# Altium PCB 家庭版电针仪.PcbDoc (part 2 of 2)
Units mm, origin at the board's own origin, x right, y up, seen from the top; angles counter-clockwise.
Board outline 170 x 90 mm, 2 copper layers (Top Layer, Bottom Layer); 197 components, 135 nets, 622 pads, 473 vias.
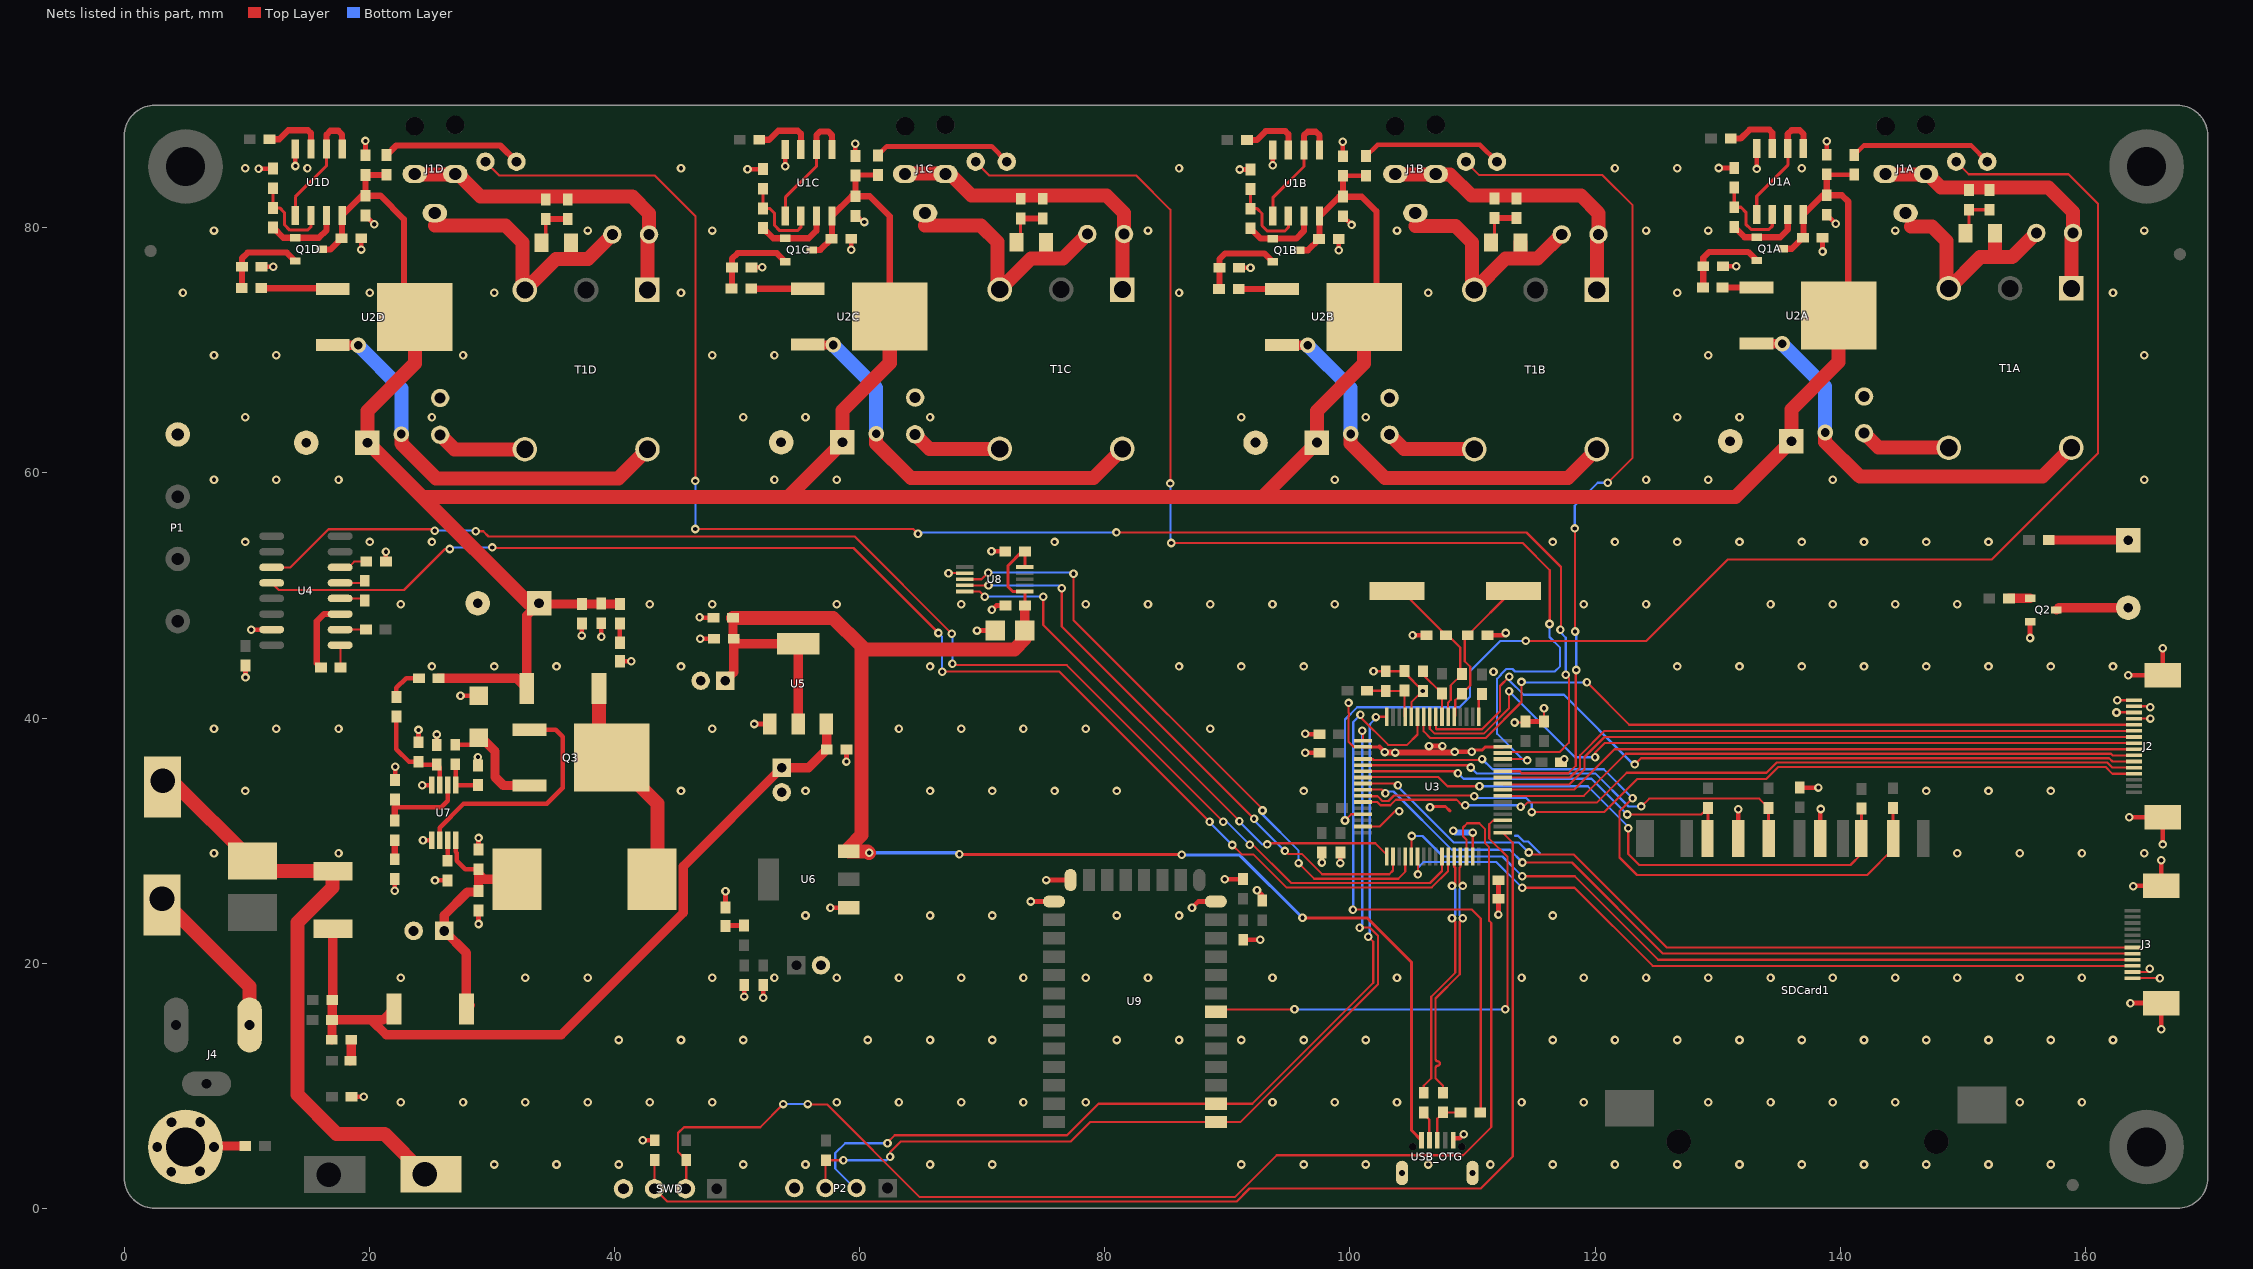
[diagram p2: the nets of this part, all layers, seen from the top]

## Via types
v1: diameter 0.7, hole 0.35, Top Layer to Bottom Layer, tented both sides, 441 vias
v2: diameter 1.2, hole 0.8, Top Layer to Bottom Layer, tented both sides, 24 vias
v3: diameter 1.27, hole 0.711, Top Layer to Bottom Layer, tented both sides, 8 vias

## Nets (pads, with @x,y where several pads share a name; then routed paths per layer and width w, separated by ;. In a path a pad name is that pad's centre, name@x,y a point inside that pad or via, vN(x,y) a via of type N, cw(c..) or ccw(c..) an arc to the next point about the centre after c; other vN are vias at no path point) (continued)
DGND: C3A.2 C3B.2 C3C.2 C3D.2 C4A.1 C4B.1 C4C.1 C4D.1 C5A.1 C5B.1 C5C.1 C5D.1 C6A.1 C6B.1 C6C.1 C6D.1 C8.2 C9.2 C10.1 C11.1 C14.1 C15.1 C16.1 C17.1 C18.1 C19.1 C20.1 C21.1 C22.1 C23.1 C24.1 C27.2 C28.2 C29.1 C30.1 C31.2 C32.1 C33.1 C34.1 C35.2 C36.1 C37.1 C38.1 C39.2 C40.1 C41.1 C42.1 C44.1 C45.2 C46.1 C47.1 C48.1 C49.1 C50.1 C51.2 D3.K D5.K FB2.2 J2.13 J2.14 J2.15 J2.16 J2.17 J2.18 J3.11 J3.12 J3.13 J3.14 P1.4 P2.4 Q2.2 R5A.1 R5B.1 R5C.1 R5D.1 R6A.1 R6B.1 R6C.1 R6D.1 R7A.1 R7B.1 R7C.1 R7D.1 R12.1 R15.2 R26.2 R29.1 R30.1 R31.1 SDCard1.3 SDCard1.6 SWD.4 U1A.4 U1B.4 U1C.4 U1D.4 U3.12 U3.18 U3.31 U3.47 U3.63 U4.15 U5.1 U6.1 U7.4 U7.5 U8.7 U9.13 U9.21 U9.22 USB_OTG.5 USB_OTG.6 USB_OTG.7 | length 161.5
  Top Layer w0.178: v1(67.243,51.825) U8.7@68.566,51.825 ; v1(99.888,41.237) 99.888,40.408 99.908,40.389 99.908,40.145 99.888,40.126 99.888,38.052 100.284,37.657 U3.18@101.061,37.657 ; U3.31@101.061,31.156 102.44,31.156 103.751,32.468 103.829,32.39 v1(104.031,32.39) ; v1(101.919,43.817) C15.1@102.926,43.817 104.424,43.817 C16.1@104.45,43.842 104.45,43.716 v1(105.948,42.217) 105.011,41.28 U3.12@105.011,40.106 ; v1(109.943,37.255) 109.943,37.36 v1@109.973,37.391 ; U3.47@110.011,28.707 v1(110.011,30.658) ; v1(113.428,39.638) 114.24,39.638 C18.1@114.33,39.728 ; C22.1@115.829,39.728 v1(115.829,40.8) ; R12.1@117.224,36.389 v1(117.482,36.648) ; v1(162.611,41.453) 162.617,41.459 J2.16@163.959,41.459 ; J3.12@163.849,18.784 v1(166.084,18.784) ; J3.11@163.849,19.284 165.122,19.284 165.254,19.416 v1(165.254,19.544) ; J2.13@163.959,39.959 v1(165.312,39.959) ; J2.15@163.959,40.959 165.239,40.959 v1(165.303,40.894)
  Top Layer w0.203: v1(162.541,40.459) J2.14@163.959,40.459
  Top Layer w0.254: U3.18@101.061,37.657 102.407,37.657 ; v1@106.587,32.644 106.735,32.791 107.798,32.791 108.153,32.436 ; v1@109.973,37.391 110.792,37.391 111.057,37.657 U3.63@112.461,37.657
  Top Layer w0.381: v1(9.888,43.319) C9.2@9.888,44.285 ; v1(10.345,47.219) U4.15@12.022,47.219 ; v1(10.954,84.83) R5D.1@12.13,84.83 ; R6D.1@11.203,76.817 v1(12.161,76.817) ; v1(13.959,85.048) U1D.4@13.959,86.418 ; FB2.2@18.548,9.1 v1(19.544,9.1) ; v1(19.331,78.228) C6D.1@19.331,79.146 ; C4D.1@19.674,81.013 v1(20.389,80.297) ; C5D.1@19.674,85.915 v1(19.674,87.09) ; C8.2@21.342,52.765 v1(21.342,53.574) ; v1(22.068,25.909) R31.1@22.068,26.884 ; C42.1@22.094,34.961 v1(22.094,36.022) ; C38.1@23.999,38.034 v1(23.999,39.035) ; v1(24.31,34.531) U7.4@25.081,34.531 ; v1(24.366,30.031) U7.5@25.081,30.031 ; v1(25.347,26.757) R29.1@26.361,26.757 ; R26.2@25.497,37.805 v1(25.497,38.659) ; v1(27.428,41.831) R30.1@28.926,41.831 ; C44.1@28.85,36.129 v1(28.85,36.82) ; v1(28.901,23.2) C36.1@28.901,24.293 ; C37.1@28.901,29.271 v1(28.901,30.223) ; v1(37.316,46.732) 37.334,46.75 C40.1@37.334,47.712 ; C41.1@38.908,47.737 38.908,46.663 v1(38.929,46.642) ; D5.K@40.432,44.64 41.335,44.64 v1(41.348,44.626) ; v1(42.291,5.55) R15.2@43.282,5.55 ; v1(46.933,48.238) 46.989,48.181 C34.1@48.065,48.181 ; v1(46.98,46.483) 46.983,46.48 C30.1@48.116,46.48 ; D3.K@49.05,24.543 v1(49.05,25.872) ; v1(50.574,17.278) C33.1@50.574,18.22 ; v1(50.847,84.787) R5C.1@52.102,84.787 ; R6C.1@51.175,76.774 v1(52.05,76.774) ; v1(51.4,39.516) U5.1@52.674,39.516 ; v1(52.123,17.179) C32.1@52.123,18.22 ; v1(53.931,85.031) U1C.4@53.931,86.375 ; v1(57.611,24.532) U6.1@59.108,24.532 ; v1(58.915,36.45) C29.1@58.915,37.44 ; v1(59.303,78.212) C6C.1@59.303,79.103 ; C4C.1@59.646,80.97 59.771,80.97 60.264,80.477 v1(60.372,80.477) ; C5C.1@59.646,85.872 v1(59.646,86.871) ; v1(69.57,47.142) C45.2@71.063,47.142 ; v1(70.752,53.602) C46.1@71.879,53.602 ; v1(70.789,48.84) 71.129,49.18 C47.1@71.883,49.18 ; v1(73.959,25.036) U9.22@75.852,25.036 ; v1(75.216,26.786) U9.21@77.202,26.786 ; v1(87.113,24.528) 87.621,25.036 U9.13@89.052,25.036 ; v1(89.784,26.86) C49.1@91.262,26.86 ; R6B.1@90.951,76.748 v1(91.887,76.748) ; v1(90.998,84.762) R5B.1@91.878,84.762 ; C50.1@91.288,21.908 v1(92.686,21.908) ; v1(92.412,25.964) 92.837,25.538 C48.1@92.837,25.108 ; v1(93.707,85.108) U1B.4@93.707,86.35 ; v1(96.357,37.175) C19.1@97.503,37.175 ; v1(96.363,38.723) 96.412,38.674 C23.1@97.503,38.674 ; C21.1@97.693,29.035 97.693,28.234 v1(97.713,28.215) ; v1(99.079,78.176) C6B.1@99.079,79.078 ; v1(99.217,28.173) C17.1@99.217,29.035 ; C4B.1@99.422,80.945 v1(100.13,80.237) ; C5B.1@99.422,85.847 v1(99.422,87.029) ; 102.407,37.657 v1(102.838,37.226) v1@102.878,37.186 ; v1(105.105,46.761) C14.1@106.236,46.761 ; v1(106.451,37.719) v1(107.544,37.719) ; USB_OTG.5@108.424,5.562 108.424,5.71 108.939,5.71 v1(109.276,6.046) ; v1@108.56,37.186 v1(108.56,37.236) ; v1@108.821,37.255 v1(109.943,37.255) ; C11.1@111.214,46.761 112.522,46.761 v1(112.7,46.939) ; v1(112.114,23.966) C24.1@112.114,25.263 C20.1@112.114,26.761 ; C18.1@114.33,39.728 C22.1@115.829,39.728 ; v1(130.083,84.881) R5A.1@131.357,84.881 ; R6A.1@130.43,76.868 v1(131.516,76.868) ; SDCard1.6@131.673,30.174 v1(131.673,32.568) ; v1(133.186,84.804) U1A.4@133.186,86.469 ; C51.2@136.703,34.328 v1(138.223,34.328) ; SDCard1.3@138.373,30.174 138.373,32.537 v1(138.419,32.583) ; v1(138.558,78.066) C6A.1@138.558,79.197 ; C4A.1@138.901,81.064 v1(139.625,80.34) ; C5A.1@138.901,85.966 v1(138.901,87.063) ; v1(155.491,46.537) Q2.2@155.491,47.869 ; v1@163.502,43.502 J2.18@166.308,43.502 v1(166.308,45.692) ; v1(163.584,31.916) J2.17@166.308,31.916 v1(166.308,29.692) ; v1(163.678,16.739) 163.691,16.752 J3.14@166.199,16.752 v1(166.199,14.611) ; v1(163.906,26.289) 163.944,26.327 J3.13@166.199,26.327 v1(166.199,28.404)
  Top Layer w0.508: v1@102.878,37.186 v1(103.683,37.186) v1@108.56,37.186
  Bottom Layer w0.178: v1@67.221,51.847 v1(67.243,51.825) ; v1@101.87,43.768 v1(101.919,43.817) ; v1(102.838,37.226) 102.912,37.301 v1@103.004,37.301 ; v1@103.831,32.39 v1(104.031,32.39) ; v1(108.433,30.81) v1@108.585,30.658 ; v1(109.943,37.255) v1@109.943,37.36 ; v1(110.011,30.658) v1@110.063,30.709 ; v1@112.06,23.912 v1(112.114,23.966) ; 113.469,30.404 113.711,30.404 114.193,29.921 114.563,29.921 114.994,29.489 115.494,28.99 115.494,28.981 ; v1@115.814,40.815 v1(115.829,40.8) ; v1(117.482,36.648) v1@117.549,36.648 ; v1@165.254,19.278 v1(165.254,19.544) ; v1@165.268,41 165.303,40.964 v1(165.303,40.894) ; v1(165.312,39.959) v1@165.318,39.965 ; v1(166.084,18.784) v1@166.214,18.654
  Bottom Layer w0.381: v1@10.926,84.859 v1(10.954,84.83) ; v1(12.161,76.817) v1@12.265,76.713 ; v1(13.959,85.048) v1@14.003,85.004 ; v1(19.331,78.228) v1@19.361,78.197 ; v1(19.544,9.1) v1@19.597,9.048 ; v1(19.674,87.09) v1@19.723,87.14 ; v1(20.389,80.297) v1@20.447,80.297 ; v1@22.054,25.895 v1(22.068,25.909) ; v1(23.999,39.035) v1@24.106,39.142 ; v1@24.258,34.583 v1(24.31,34.531) ; v1@24.308,29.973 v1(24.366,30.031) ; v1@25.322,26.782 v1(25.347,26.757) ; v1(25.497,38.659) v1@25.575,38.737 ; v1@27.398,41.802 v1(27.428,41.831) ; v1(28.85,36.82) v1@28.918,36.888 ; v1(28.901,23.2) v1@28.922,23.179 ; v1(28.901,30.223) v1@28.959,30.282 ; v1@37.316,46.687 v1(37.316,46.732) ; v1@42.263,5.578 v1(42.291,5.55) ; v1@49.041,25.881 v1(49.05,25.872) ; v1(50.574,17.278) v1@50.612,17.24 ; v1@50.804,84.744 v1(50.847,84.787) ; v1@51.321,39.594 v1(51.4,39.516) ; v1(52.05,76.774) v1@52.092,76.732 ; v1(52.123,17.179) v1@52.183,17.12 ; v1(53.931,85.031) v1@53.939,85.022 ; v1@57.591,24.552 v1(57.611,24.532) ; v1(59.303,78.212) v1@59.325,78.19 ; v1(59.646,86.871) v1@59.761,86.986 ; v1(60.372,80.477) v1@60.516,80.333 ; v1@69.565,47.138 v1(69.57,47.142) ; v1@70.735,53.585 v1(70.752,53.602) ; v1@70.753,48.84 v1(70.789,48.84) ; v1@73.906,25.089 v1(73.959,25.036) ; v1@75.174,26.828 v1(75.216,26.786) ; v1@89.767,26.878 v1(89.784,26.86) ; v1@90.914,84.699 90.935,84.699 v1(90.998,84.762) ; v1(91.887,76.748) v1@91.895,76.757 ; v1(92.412,25.964) v1@92.412,25.976 ; v1(92.686,21.908) v1@92.696,21.918 ; v1(93.707,85.108) v1@93.71,85.105 ; v1@96.341,37.191 v1(96.357,37.175) ; v1@99.069,78.166 v1(99.079,78.176) ; v1(99.217,28.173) v1@99.227,28.163 ; v1(99.422,87.029) v1@99.509,87.116 ; v1(100.13,80.237) v1@100.243,80.237 ; v1(112.7,46.939) v1@112.7,47.041 ; v1@130.076,84.874 v1(130.083,84.881) ; v1(131.516,76.868) v1@131.618,76.765 ; v1@131.657,32.584 v1(131.673,32.568) ; v1(133.186,84.804) v1@133.205,84.786 ; v1(138.223,34.328) v1@138.239,34.313 ; v1(138.558,78.066) v1@138.625,77.999 ; v1(138.901,87.063) v1@138.996,87.158 ; v1@139.625,80.245 v1(139.625,80.34) ; v1@155.449,46.495 v1(155.491,46.537) ; v1@163.855,26.289 v1(163.906,26.289) ; v1@166.141,14.554 v1(166.199,14.611) ; v1(166.199,28.404) v1@166.218,28.423
  Bottom Layer w0.508: v1@108.585,30.658 v1(110.011,30.658)
  other v1: 30.179,3.575 35.259,3.575 40.339,3.575 50.499,3.575 55.579,3.575 65.739,3.575 70.819,3.575 91.139,3.575 96.219,3.575 101.299,3.575 106.379,3.575 111.459,3.575 116.539,3.575 121.619,3.575 126.699,3.575 131.779,3.575 136.859,3.575 141.939,3.575 147.019,3.575 152.099,3.575 157.179,3.575 22.559,8.655 27.639,8.655 32.719,8.655 37.799,8.655 42.879,8.655 47.959,8.655 58.119,8.655 63.199,8.655 68.279,8.655 73.359,8.655 78.439,8.655 93.679,8.655 98.759,8.655 103.839,8.655 113.999,8.655 119.079,8.655 129.239,8.655 134.319,8.655 139.399,8.655 144.479,8.655 154.639,8.655 159.719,8.655 40.339,13.735 45.419,13.735 50.499,13.735 60.659,13.735 65.739,13.735 70.819,13.735 80.979,13.735 86.059,13.735 91.139,13.735 96.219,13.735 101.299,13.735 116.539,13.735 121.619,13.735 126.699,13.735 131.779,13.735 136.859,13.735 141.939,13.735 147.019,13.735 152.099,13.735 157.179,13.735 162.259,13.735 22.559,18.815 32.719,18.815 37.799,18.815 47.959,18.815 53.039,18.815 58.119,18.815 63.199,18.815 68.279,18.815 73.359,18.815 78.439,18.815 83.519,18.815 93.679,18.815 103.839,18.815 113.999,18.815 119.079,18.815 124.159,18.815 129.239,18.815 134.319,18.815 139.399,18.815 144.479,18.815 149.559,18.815 154.639,18.815 159.719,18.815 55.579,23.895 65.739,23.895 70.819,23.895 80.979,23.895 86.059,23.895 116.539,23.895 7.319,28.975 17.479,28.975 149.559,28.975 154.639,28.975 159.719,28.975 164.799,28.975 106.528,32.715 9.859,34.055 45.419,34.055 55.579,34.055 65.739,34.055 70.819,34.055 75.899,34.055 80.979,34.055 96.219,34.055 147.019,34.055 152.099,34.055 157.179,34.055 7.319,39.135 12.399,39.135 17.479,39.135 47.959,39.135 63.199,39.135 68.279,39.135 73.359,39.135 78.439,39.135 88.599,39.135 163.5,43.5 111.709,43.79 25.099,44.215 30.179,44.215 35.259,44.215 45.419,44.215 65.739,44.215 86.059,44.215 91.139,44.215 96.219,44.215 126.699,44.215 131.779,44.215 136.859,44.215 141.939,44.215 147.019,44.215 152.099,44.215 157.179,44.215 162.259,44.215 22.559,49.295 42.879,49.295 47.959,49.295 58.119,49.295 68.279,49.295 78.439,49.295 83.519,49.295 88.599,49.295 93.679,49.295 98.759,49.295 119.079,49.295 124.159,49.295 134.319,49.295 139.399,49.295 144.479,49.295 149.559,49.295 9.859,54.375 20.019,54.375 25.099,54.375 75.899,54.375 116.539,54.375 121.619,54.375 126.699,54.375 131.779,54.375 136.859,54.375 141.939,54.375 147.019,54.375 152.099,54.375 7.319,59.455 12.399,59.455 17.479,59.455 53.039,59.455 58.119,59.455 98.759,59.455 124.159,59.455 129.239,59.455 139.399,59.455 164.799,59.455 9.859,64.535 25.099,64.535 50.499,64.535 55.579,64.535 65.739,64.535 91.139,64.535 101.299,64.535 126.699,64.535 131.779,64.535 7.319,69.615 12.399,69.615 27.639,69.615 47.959,69.615 53.039,69.615 129.239,69.615 164.799,69.615 4.779,74.695 20.019,74.695 30.179,74.695 45.419,74.695 86.059,74.695 106.379,74.695 126.699,74.695 162.259,74.695 7.319,79.775 37.799,79.775 47.959,79.775 83.519,79.775 103.839,79.775 124.159,79.775 129.239,79.775 144.479,79.775 164.799,79.775 9.859,84.855 14.939,84.855 45.419,84.855 86.059,84.855 121.619,84.855 126.699,84.855 136.859,84.855
DS1: J2.5 U3.27 | length 65.7
  Top Layer w0.178: U3.27@101.061,33.156 102.222,33.156 102.493,32.886 103.298,32.886 103.744,33.332 108.705,33.332 109.144,32.893 v1(109.398,32.893) ; v1(113.919,32.766) 114.148,32.766 114.503,33.122 120.167,33.122 122.588,35.542 133.984,35.542 134.814,36.373 161.795,36.373 162.209,35.959 J2.5@163.959,35.959
  Bottom Layer w0.178: v1(109.398,32.893) 114.224,32.893 114.097,32.766 v1(113.919,32.766)
DS2: J2.8 U3.56 | length 52.9
  Top Layer w0.178: U3.56@112.461,34.157 112.476,34.172 118.296,34.172 121.583,37.459 J2.8@163.959,37.459
DS3: J2.11 U3.58 | length 53.7
  Top Layer w0.178: U3.58@112.461,35.157 112.47,35.147 117.959,35.147 118.781,35.969 118.781,36.973 120.767,38.959 J2.11@163.959,38.959
HOST_WAKEUP: U3.51 U9.7 | length 40.8
  Top Layer w0.178: U9.7@89.052,16.036 89.25,16.233 v1(95.471,16.233) ; U3.51@112.461,31.657 111.684,31.657 111.36,31.333 111.36,30.164 112.863,28.661 112.863,16.258 112.838,16.233 v1(112.667,16.233)
  Bottom Layer w0.178: v1(95.471,16.233) v1(112.667,16.233)
LED0: SYS1.K U3.59 | length 69.6
  Top Layer w0.178: SYS1.K@109.46,85.396 110.554,84.303 120.599,84.303 123.063,81.839 123.063,61.235 v1(121.031,59.203) ; U3.59@112.461,35.656 113.85,35.656 114.004,35.503 117.812,35.503 118.426,36.117 118.426,43.891 v1(118.459,43.925) ; v1(118.339,55.474) 118.364,55.448 v1(118.364,47.066)
  Bottom Layer w0.178: v1(118.339,55.474) 118.339,57.336 120.206,59.203 v1(121.031,59.203) ; v1(118.364,47.066) 118.459,46.971 v1(118.459,43.925)
LED1: SYS2.K U3.61 | length 100.5
  Top Layer w0.178: SYS2.K@69.46,85.396 70.579,84.277 82.55,84.277 85.347,81.481 v1(85.347,59.146) ; v1(85.417,54.283) 114.093,54.283 116.307,52.07 116.307,47.912 v1@116.053,47.658 ; U3.61@112.461,36.657 114.351,36.657 v1(114.464,36.543)
  Bottom Layer w0.178: v1(85.347,59.146) 85.347,54.627 85.417,54.557 v1(85.417,54.283) ; v1@114.19,36.542 112.004,38.728 112.004,43.213 112.326,43.534 112.326,43.577 112.749,44 113.26,44 113.466,43.794 116.717,43.794 117.145,44.221 117.145,45.745 116.281,46.609 v1(116.281,47.676) v1@116.036,47.676
LED2: SYS3.K U3.62 | length 136.9
  Top Layer w0.178: SYS3.K@29.46,85.396 30.579,84.277 43.282,84.277 46.59,80.969 v1(46.59,59.35) ; v1(46.59,55.431) 64.376,55.431 v1(64.759,55.048) ; v1(80.944,55.146) 114.399,55.146 117.221,52.324 v1@117.221,47.219 ; U3.62@112.461,37.156 112.461,37.24 117.115,37.24 117.861,37.987 117.861,43.282 v1(117.61,43.533)
  Bottom Layer w0.178: v1(46.59,55.431) v1(46.59,59.35) ; v1(64.759,55.048) 64.856,55.146 v1(80.944,55.146) ; v1(117.17,47.219) 117.17,46.996 117.61,46.557 v1(117.61,43.533)
LED3: SYS4.K U3.29 | length 115
  Top Layer w0.178: v1(99.591,31.645) 100.103,32.156 U3.29@101.061,32.156 ; v1(114.339,46.295) 124.175,46.295 130.821,52.941 152.37,52.941 161.036,61.607 161.036,81.966 158.623,84.379 150.477,84.379 SYS4.K@149.46,85.396
  Bottom Layer w0.178: v1@99.591,31.629 v1(99.591,31.645) 99.591,39.882 100.596,40.887 108.93,40.887 109.786,41.742 109.786,43.829 112.252,46.295 v1(114.339,46.295)
NetBEEP_1: BEEP.1 R16.1 | length 6.5
  Top Layer w0.762: R16.1@157.01,54.534 163.466,54.534 BEEP.1@163.5,54.5
NetBEEP_2: BEEP.2 Q2.3 | length 5.9
  Top Layer w0.762: Q2.3@157.641,48.819 157.822,49 BEEP.2@163.5,49
NetC1A_1: C1A.1 C2A.1 D1A.A | length 3.7
  Top Layer w0.254: D1A.A@150.223,79.56 150.509,79.846 C1A.1@150.509,81.475 C2A.1@152.185,81.475
NetC1A_2: C1A.2 C2A.2 J1A.1 R2A.2 T1A.1 | length 22.9
  Top Layer w1.143: J1A.1@143.7,84.361 147,84.361 147.168,84.361 148.238,83.291 150.509,83.291 152.185,83.291 157.011,83.291 158.995,81.307 R2A.2@158.995,79.585 158.858,79.448 T1A.1@158.858,75.059
NetC1B_1: C1B.1 C2B.1 D1B.A | length 3.9
  Top Layer w0.254: D1B.A@111.506,78.803 111.792,79.088 C1B.1@111.792,80.797
  Top Layer w0.508: C1B.1@111.792,80.797 C2B.1@113.595,80.797
NetC1B_2: C1B.2 C2B.2 J1B.1 R2B.2 T1B.1 | length 24.2
  Top Layer w1.143: J1B.1@103.7,84.361 107,84.361 108.179,84.361 109.91,82.63 111.792,82.63 113.595,82.63 118.836,82.63 120.278,81.188 R2B.2@120.278,79.466 120.141,79.329 T1B.1@120.141,74.94
NetC1C_1: C1C.1 C2C.1 D1C.A | length 3.9
  Top Layer w0.254: D1C.A@72.797,78.828 73.133,79.165 C1C.1@73.133,80.771
  Top Layer w0.508: C1C.1@73.133,80.771 C2C.1@74.936,80.771
NetC1C_2: C1C.2 C2C.2 J1C.1 R2C.2 T1C.1 | length 25.5
  Top Layer w1.143: J1C.1@63.7,84.437 67,84.437 67.335,84.437 69.139,82.634 69.444,82.634 69.447,82.63 73.133,82.63 74.936,82.63 80.151,82.63 81.569,81.213 R2C.2@81.569,79.492 81.431,79.354 T1C.1@81.431,74.966
NetC1D_1: C1D.1 C2D.1 D1D.A | length 3.9
  Top Layer w0.254: D1D.A@34.044,78.795 34.38,79.131 C1D.1@34.38,80.713
  Top Layer w0.508: C1D.1@34.38,80.713 C2D.1@36.184,80.713
NetC1D_2: C1D.2 C2D.2 J1D.1 R2D.2 T1D.1 | length 26.5
  Top Layer w1.143: J1D.1@23.878,84.336 27,84.336 27.272,84.336 29.054,82.554 34.38,82.554 36.184,82.554 41.441,82.554 42.816,81.18 R2D.2@42.816,79.458 42.678,79.321 T1D.1@42.678,74.932
NetC7_1: C7.1 U4.2 | length 2.1
  Top Layer w0.178: U4.2@17.61,47.219 C7.1@19.706,47.219
NetC8_1: C8.1 U4.6 | length 2.3
  Top Layer w0.178: U4.6@17.61,52.299 18.295,52.299 18.761,52.765 C8.1@19.742,52.765
NetC11_2: C11.2 R10.1 U3.5 Y1.1 | length 12.7
  Top Layer w0.178: U3.5@108.511,40.106 108.585,40.181 108.585,41.453 109.121,41.989 R10.1@109.149,41.989 109.815,42.655 109.815,44.181 109.36,44.637 109.36,46.507 C11.2@109.614,46.761 113.221,50.368 Y1.1@113.335,50.368
NetC12_1: C12.1 U4.5 | length 2.1
  Top Layer w0.178: U4.5@17.61,51.029 19.451,51.029 C12.1@19.621,51.199
NetC12_2: C12.2 U4.4 | length 2.1
  Top Layer w0.178: U4.4@17.61,49.759 19.461,49.759 C12.2@19.621,49.599
NetC13_1: C13.1 U4.3 | length 6.1
  Top Layer w0.508: C13.1@16.048,44.12 15.697,44.471 15.697,47.904 16.281,48.489 U4.3@17.61,48.489
NetC13_2: C13.2 U4.1 | length 1.8
  Top Layer w0.178: U4.1@17.61,45.949 17.648,45.911 C13.2@17.648,44.12
NetC14_2: C14.2 R10.2 U3.6 Y1.2 | length 13.3
  Top Layer w0.178: Y1.2@103.835,50.368 104.229,50.368 C14.2@107.836,46.761 108.001,46.761 109.004,45.758 109.004,43.733 R10.2@109.149,43.589 108.229,42.669 108.229,41.486 108.011,41.268 U3.6@108.011,40.106
NetC15_2: C15.2 C16.2 FB1.2 U3.13 | length 5.2
  Top Layer w0.178: FB1.2@101.389,42.23 102.913,42.23 C15.2@102.926,42.217 104.424,42.217 C16.2@104.45,42.242 104.45,40.168 U3.13@104.511,40.106
NetC35_1: C35.1 C36.2 C37.2 D2.C L1.1 U7.8 | length 20.9
  Top Layer w0.381: U7.8@27.031,30.031 27.031,29.09 27.129,28.992 27.129,28.371 27.829,27.671 C37.2@28.901,27.671
  Top Layer w0.762: D2.C@28.215,16.569 D2.C@27.91,16.264 27.91,20.834 C35.1@26.105,22.639 26.105,23.915 28.005,25.814 28.822,25.814 C36.2@28.901,25.893 28.901,27.284 29.339,26.845 L1.1@32.037,26.845
NetC38_2: C38.2 R24.2 R26.1 U7.3 | length 8.2
  Top Layer w0.381: R24.2@22.195,40.117 22.195,37.466 23.227,36.434 C38.2@23.999,36.434 24.227,36.205 R26.1@25.497,36.205 25.731,35.972 U7.3@25.731,34.531
NetC42_2: C42.2 C43.2 U7.2 | length 6.9
  Top Layer w0.381: 22.068,32.723 22.094,32.723 25.846,32.723 26.381,33.258 U7.2@26.381,34.531
  Top Layer w0.508: C43.2@22.068,31.633 22.068,32.723
NetC43_1: C43.1 R31.2 | length 1.5
  Top Layer w0.508: R31.2@22.068,28.484 C43.1@22.068,30.033
NetC44_2: C44.2 R28.1 U7.1 | length 3.5
  Top Layer w0.381: R28.1@26.996,36.231 27.031,36.196 U7.1@27.031,34.531 U7.1@27.031,34.531 C44.2@28.85,34.529
NetD1A_C: D1A.C J1A.2 R2A.1 T1A.3 | length 18.3
  Top Layer w1.143: 145.759,80.119 147.483,80.119 148.68,78.922 148.68,75.237 T1A.3@148.858,75.059 151.4,77.601 152.643,77.601 ; D1A.C@152.623,79.56 152.623,77.62 152.643,77.601 ; R2A.1@155.995,79.585 154.011,77.601 152.643,77.601
NetD1B_C: D1B.C J1B.2 R2B.1 T1B.3 | length 19.5
  Top Layer w1.143: 105.333,80.145 108.621,80.145 109.963,78.803 109.963,75.118 T1B.3@110.141,74.94 112.682,77.482 113.906,77.482 113.925,77.482 ; D1B.C@113.906,78.803 113.906,77.501 113.925,77.482 ; R2B.1@117.278,79.466 115.294,77.482 113.925,77.482
NetD1C_C: D1C.C J1C.2 R2C.1 T1C.3 | length 20.8
  Top Layer w1.143: 65.333,80.17 69.911,80.17 71.253,78.828 71.253,75.143 T1C.3@71.431,74.966 73.973,77.507 75.197,77.507 75.216,77.507 ; D1C.C@75.197,78.828 75.197,77.527 75.216,77.507 ; R2C.1@78.569,79.492 76.584,77.507 75.216,77.507
NetD1D_C: D1D.C J1D.2 R2D.1 T1D.3 | length 22
  Top Layer w1.143: 25.333,80.196 31.1,80.196 32.501,78.795 32.501,75.11 T1D.3@32.678,74.932 35.22,77.474 36.444,77.474 36.463,77.474 ; D1D.C@36.444,78.795 36.444,77.493 36.463,77.474 ; R2D.1@39.816,79.458 37.831,77.474 36.463,77.474
NetD3_A: D3.A R23.1 | length 1.5
  Top Layer w0.381: D3.A@49.05,23.043 49.078,23.071 R23.1@50.548,23.071
NetD4_A: D4.A L1.2 Q3.2 | length 17.7
  Top Layer w1.143: D4.A@38.731,42.416 38.731,37.804 Q3.2@39.757,36.777 43.5,33.034 43.5,27.309 L1.2@43.037,26.845
NetD5_A: D5.A R27.1 | length 1.6
  Top Layer w0.381: D5.A@40.432,46.14 R27.1@40.432,47.712
NetF1_1: F1.1 H1.1 LB1.1 VD1.1 | length 49.5
  Top Layer w1.143: LB1.1@3.124,34.874 3.903,34.874 VD1.1@10.439,28.338 11.269,27.508 F1.1@17.018,27.508 16.993,27.483 16.993,26.193 14.111,23.312 14.111,9.29 17.316,6.085 21.213,6.085 H1.1@24.522,2.776
NetFB3_2: FB3.2 MH1.MH1 | length 4.9
  Top Layer w0.762: MH1.MH1@5,5 5.08,5.08 FB3.2@9.868,5.08
  other v2: 3.832,2.993 6.168,3.019 2.685,5 7.315,5 3.857,7.032 6.195,7.034
NetJ4_4: J4.4 LA1.1 | length 13.2
  Top Layer w1.143: LA1.1@3.073,25.248 10.216,18.105 J4.4@10.216,14.961
NetPOWER_A: POWER.A R22.1 | length 1.7
  Top Layer w0.762: POWER.A@18.445,12.047 18.518,12.12 R22.1@18.518,13.749
NetQ1A_1: Q1A.1 R4A.1 U1A.7 | length 6.2
  Top Layer w0.508: R4A.1@131.357,80.081 132.198,79.24 Q1A.1@133.178,79.24 135.105,79.24 135.726,79.862 U1A.7@135.726,81.069
NetQ1A_2: Q1A.2 R3A.2 R6A.2 | length 7.4
  Top Layer w0.508: R3A.2@128.805,75.242 R3A.2@128.805,75.14 128.83,75.166 R6A.2@128.83,76.868 128.83,77.563 129.3,78.033 132.485,78.033 Q1A.2@133.178,77.34
NetQ1B_1: Q1B.1 R4B.1 U1B.7 | length 6.2
  Top Layer w0.508: R4B.1@91.878,79.962 92.719,79.121 Q1B.1@93.699,79.121 95.625,79.121 96.247,79.743 U1B.7@96.247,80.95
NetQ1B_2: Q1B.2 R3B.2 R6B.2 | length 7.4
  Top Layer w0.508: R3B.2@89.326,75.123 R3B.2@89.326,75.021 89.351,75.047 R6B.2@89.351,76.748 89.351,77.444 89.821,77.914 93.006,77.914 Q1B.2@93.699,77.221
NetQ1C_1: Q1C.1 R4C.1 U1C.7 | length 6.2
  Top Layer w0.508: R4C.1@52.102,79.987 52.943,79.146 Q1C.1@53.922,79.146 55.849,79.146 56.471,79.768 U1C.7@56.471,80.975
NetQ1C_2: Q1C.2 R3C.2 R6C.2 | length 7.4
  Top Layer w0.508: R3C.2@49.549,75.148 R3C.2@49.549,75.047 49.575,75.072 R6C.2@49.575,76.774 49.575,77.469 50.044,77.939 53.23,77.939 Q1C.2@53.922,77.246
NetQ1D_1: Q1D.1 R4D.1 U1D.7 | length 6.2
  Top Layer w0.508: R4D.1@12.13,80.03 12.971,79.189 Q1D.1@13.95,79.189 15.877,79.189 16.499,79.811 U1D.7@16.499,81.018
NetQ1D_2: Q1D.2 R3D.2 R6D.2 | length 7.4
  Top Layer w0.508: R3D.2@9.577,75.191 R3D.2@9.577,75.09 9.603,75.115 R6D.2@9.603,76.817 9.603,77.512 10.072,77.982 13.258,77.982 Q1D.2@13.95,77.289
NetQ2_1: Q2.1 R18.1 | length 1.7
  Top Layer w0.762: R18.1@153.759,49.759 153.769,49.769 Q2.1@155.491,49.769
NetQ3_1: Q3.1 U7.6 | length 19.6
  Top Layer w0.381: U7.6@25.731,30.031 25.731,31.059 27.672,33 34.479,33 35.777,34.298 35.777,38.489 35.209,39.057 Q3.1@33.057,39.057
NetQ3_3: Q3.3 R28.2 R30.2 | length 9.2
  Top Layer w0.381: R28.2@26.996,37.831 28.355,37.831 R30.2@28.926,38.402
  Top Layer w0.762: R30.2@28.926,38.402 29.133,38.402 30.24,37.295 30.24,35.187 30.93,34.497 Q3.3@33.057,34.497
NetR1A_2: R1A.2 U1A.3 | length 5.1
  Top Layer w0.508: R1A.2@131.065,87.278 131.865,87.278 132.602,88.015 134.202,88.015 134.456,87.761 U1A.3@134.456,86.469
NetR1B_2: R1B.2 U1B.3 | length 5.1
  Top Layer w0.508: R1B.2@91.586,87.159 92.386,87.159 93.123,87.896 94.723,87.896 94.977,87.642 U1B.3@94.977,86.35
NetR1C_2: R1C.2 U1C.3 | length 5.1
  Top Layer w0.508: R1C.2@51.81,87.185 52.61,87.185 53.346,87.921 54.947,87.921 55.201,87.667 U1C.3@55.201,86.375
NetR1D_2: R1D.2 U1D.3 | length 5.1
  Top Layer w0.508: R1D.2@11.838,87.228 12.638,87.228 13.374,87.964 14.975,87.964 15.229,87.71 U1D.3@15.229,86.418
NetR3A_1: R3A.1 U2A.1 | length 2.8
  Top Layer w0.508: R3A.1@130.405,75.14 130.418,75.127 U2A.1@133.177,75.127
NetR3B_1: R3B.1 U2B.1 | length 2.8
  Top Layer w0.508: R3B.1@90.926,75.021 90.939,75.008 U2B.1@93.698,75.008
NetR3C_1: R3C.1 U2C.1 | length 4.6
  Top Layer w0.508: R3C.1@51.149,75.047 51.163,75.033 U2C.1@55.75,75.033
NetR3D_1: R3D.1 U2D.1 | length 5.9
  Top Layer w0.508: R3D.1@11.177,75.09 11.191,75.076 16.921,75.076 U2D.1@16.998,75
NetR4A_2: R4A.2 R5A.2 U1A.6 | length 7.1
  Top Layer w0.254: R5A.2@131.357,83.281 R4A.2@131.357,81.681 131.9,81.681 132.297,81.284 132.297,80.293 132.729,79.862 134.177,79.862 134.456,80.141 U1A.6@134.456,81.069
NetR4B_2: R4B.2 R5B.2 U1B.6 | length 7.1
  Top Layer w0.254: R5B.2@91.878,83.162 R4B.2@91.878,81.562 92.421,81.562 92.818,81.165 92.818,80.174 93.25,79.743 94.698,79.743 94.977,80.022 U1B.6@94.977,80.95
NetR4C_2: R4C.2 R5C.2 U1C.6 | length 7.1
  Top Layer w0.254: R5C.2@52.102,83.187 R4C.2@52.102,81.587 52.645,81.587 53.042,81.19 53.042,80.2 53.473,79.768 54.921,79.768 55.201,80.047 U1C.6@55.201,80.975
NetR4D_2: R4D.2 R5D.2 U1D.6 | length 7.1
  Top Layer w0.254: R5D.2@12.13,83.23 R4D.2@12.13,81.63 12.673,81.63 13.07,81.233 13.07,80.243 13.501,79.811 14.949,79.811 15.229,80.09 U1D.6@15.229,81.018
NetR7A_2: R7A.2 T1A.6 | length 7.4
  Top Layer w1.143: R7A.2@141.949,63.243 143.133,62.059 T1A.6@148.858,62.059
NetR7B_2: R7B.2 T1B.6 | length 7.4
  Top Layer w1.143: R7B.2@103.232,63.124 104.415,61.94 T1B.6@110.141,61.94
NetR7C_2: R7C.2 T1C.6 | length 7.4
  Top Layer w1.143: R7C.2@64.522,63.149 65.706,61.966 T1C.6@71.431,61.966
NetR7D_2: R7D.2 T1D.6 | length 7.4
  Top Layer w1.143: R7D.2@25.77,63.116 26.953,61.932 T1D.6@32.678,61.932
NetR11_1: R11.1 U3.1 | length 2
  Top Layer w0.178: U3.1@110.511,40.106 110.511,41.7 R11.1@110.774,41.963
NetR17_2: R17.2 SYS1.A | length 11.7
  Top Layer w0.381: R17.2@101.309,85.848 102.253,86.792 110.604,86.792 SYS1.A@112,85.396
NetR19_2: R19.2 SYS2.A | length 11.3
  Top Layer w0.381: R19.2@61.486,85.91 62.216,86.639 70.757,86.639 SYS2.A@72,85.396
NetR20_2: R20.2 SYS3.A | length 11.5
  Top Layer w0.508: R20.2@21.395,85.937 22.174,86.716 30.681,86.716 SYS3.A@32,85.396
NetR21_2: R21.2 SYS4.A | length 11.7
  Top Layer w0.381: R21.2@141.152,85.941 141.927,86.716 150.681,86.716 SYS4.A@152,85.396
NetR24_1: R24.1 R25.1 | length 2.9
  Top Layer w0.381: R24.1@22.195,41.717 22.195,42.458 22.991,43.254 R25.1@24.037,43.254
NetR29_2: R29.2 U7.7 | length 1.7
  Top Layer w0.381: R29.2@26.361,28.357 26.381,28.377 U7.7@26.381,30.031
NetR32_2: R32.2 USB_OTG.2 | length 2.5
  Top Layer w0.178: R32.2@105.893,7.836 105.959,7.77 106.474,7.254 USB_OTG.2@106.474,5.562
NetR33_2: R33.2 R34.2 USB_OTG.3 | length 4
  Top Layer w0.178: USB_OTG.3@107.124,5.562 107.124,7.304 107.511,7.691 107.594,7.691 R33.2@107.594,7.836 107.607,7.823 R34.2@109.03,7.823
NetT1A_4: T1A.4 U2A.3 | length 33.8
  Top Layer w0.762: U2A.3@133.177,70.567 133.204,70.54 v3(135.269,70.54)
  Top Layer w1.143: v3(138.774,63.301) 138.774,62.513 141.594,59.694 156.493,59.694 T1A.4@158.858,62.059
  Bottom Layer w1.143: v3(135.269,70.54) 138.774,67.035 v3(138.774,63.301)
NetT1B_4: T1B.4 U2B.3 | length 33.8
  Top Layer w0.762: U2B.3@94.46,70.448 94.487,70.421 v3(96.552,70.421)
  Top Layer w1.143: v3(100.057,63.182) 100.057,62.394 102.876,59.575 117.775,59.575 T1B.4@120.141,61.94
  Bottom Layer w1.143: v3(96.552,70.421) 100.057,66.916 v3(100.057,63.182)
NetT1C_4: T1C.4 U2C.3 | length 33.8
  Top Layer w0.762: U2C.3@55.75,70.473 55.777,70.446 v3(57.842,70.446)
  Top Layer w1.143: v3(61.347,63.207) 61.347,62.42 64.167,59.6 79.066,59.6 T1C.4@81.431,61.966
  Bottom Layer w1.143: v3(57.842,70.446) 61.347,66.941 v3(61.347,63.207)
NetT1D_4: T1D.4 U2D.3 | length 33.8
  Top Layer w0.762: U2D.3@16.998,70.44 17.024,70.413 v3(19.089,70.413)
  Top Layer w1.143: v3(22.595,63.174) 22.595,62.386 25.414,59.567 40.313,59.567 T1D.4@42.678,61.932
  Bottom Layer w1.143: v3(19.089,70.413) 22.595,66.908 v3(22.595,63.174)
NetU1A_1: U1A.1 U1A.2 U1A.5 | length 10.4
  Top Layer w0.254: U1A.5@133.186,81.069 133.186,82.579 135.726,85.119 U1A.2@135.726,86.469
  Top Layer w0.508: U1A.2@135.726,86.469 135.726,87.659 136.031,87.964 136.691,87.964 136.996,87.659 U1A.1@136.996,86.469
NetU1B_1: U1B.1 U1B.2 U1B.5 | length 10.4
  Top Layer w0.254: U1B.5@93.707,80.95 93.707,82.46 96.247,85 U1B.2@96.247,86.35
  Top Layer w0.508: U1B.2@96.247,86.35 96.247,87.54 96.552,87.845 97.212,87.845 97.517,87.54 U1B.1@97.517,86.35
NetU1C_1: U1C.1 U1C.2 U1C.5 | length 10.4
  Top Layer w0.254: U1C.5@53.931,80.975 53.931,82.486 56.471,85.026 U1C.2@56.471,86.375
  Top Layer w0.508: U1C.2@56.471,86.375 56.471,87.566 56.775,87.871 57.436,87.871 57.741,87.566 U1C.1@57.741,86.375
NetU1D_1: U1D.1 U1D.2 U1D.5 | length 10.4
  Top Layer w0.254: U1D.5@13.959,81.018 13.959,82.529 16.499,85.069 U1D.2@16.499,86.418
  Top Layer w0.508: U1D.2@16.499,86.418 16.499,87.609 16.803,87.913 17.464,87.913 17.769,87.609 U1D.1@17.769,86.418
NetU3_33: U3.33 U8.10 | length 45
  Top Layer w0.178: U8.10@68.566,50.325 69.791,50.325 v1(70.206,49.911) ; v1(74.981,49.911) 74.981,47.6 v1@90.995,31.585 ; v1@93.243,29.667 v1(93.243,29.693) 93.335,29.784 102.072,29.784 103.011,28.845 U3.33@103.011,28.707
  Bottom Layer w0.178: v1@70.206,49.835 v1(70.206,49.911) v1(74.981,49.911) ; v1(90.983,31.572) 90.983,31.547 92.837,29.693 v1(93.243,29.693)
NetU3_34: U3.34 U8.9 | length 47.9
  Top Layer w0.178: U8.9@68.566,50.825 v1(70.51,50.825) ; v1(76.479,50.597) 76.479,47.473 v1(92.177,31.775) ; v1(94.691,29.159) 94.952,28.898 96.095,28.898 97.739,27.254 103.2,27.254 103.511,27.565 U3.34@103.511,28.707
  Bottom Layer w0.178: v1(70.51,50.825) 76.251,50.825 v1(76.479,50.597) ; v1(92.177,31.775) 92.177,31.674 v1(94.691,29.159)
NetU3_36: U3.36 U8.8 | length 51.1
  Top Layer w0.178: U8.8@68.566,51.325 69.944,51.325 v1(70.485,51.867) ; v1(77.445,51.765) 77.445,47.981 92.913,32.512 v1(92.862,32.461) ; v1(95.809,28.169) 97.079,26.899 103.937,26.899 104.511,27.473 U3.36@104.511,28.707
  Bottom Layer w0.178: v1(70.485,51.867) 77.343,51.867 v1(77.445,51.765) ; v1(92.862,32.461) 92.862,32.131 95.809,29.185 v1(95.809,28.169)
PC4: J3.7 U3.24 | length 68.7
  Top Layer w0.178: U3.24@101.061,34.656 103.781,34.656 v1(103.915,34.523) ; v1(114.579,29.032) 114.739,28.873 118.27,28.873 125.859,21.284 J3.7@163.849,21.284
  Bottom Layer w0.178: v1(103.915,34.523) v1@103.8,34.523 ; v1(114.579,29.032) 113.767,29.845 108.478,29.845 v1@103.8,34.523 ; v1@103.8,34.523 103.735,34.588 103.734,34.586 103.797,34.523 v1@103.8,34.523
PC5: J3.8 U3.25 | length 69
  Top Layer w0.178: U3.25@101.061,34.157 101.067,34.163 102.61,34.163 102.686,34.087 102.895,34.087 v1(102.895,33.858) ; v1(114.071,28.219) 118.11,28.219 125.546,20.784 J3.8@163.849,20.784
  Bottom Layer w0.178: v1(102.895,33.858) v1@102.895,34.011 ; v1(114.071,28.219) 113.03,29.261 108.868,29.261 108.861,29.254 108.312,29.254 103.555,34.011 v1@102.895,34.011 ; v1@102.895,34.011 102.87,34.036 102.819,34.036 102.895,34.112 v1@102.895,34.011
PC6: J3.9 U3.37 | length 64.9
  Top Layer w0.178: v1@104.902,30.505 v1(105.029,30.378) 105.011,30.36 U3.37@105.011,28.707 ; v1(114.046,27.102) 118.339,27.102 125.157,20.284 J3.9@163.849,20.284
  Bottom Layer w0.178: v1(105.029,30.378) 105.918,30.378 107.594,28.702 112.446,28.702 v1(114.046,27.102)
PC7: J3.10 U3.38 | length 64
  Top Layer w0.178: U3.38@105.511,28.707 105.546,28.672 v1(105.546,27.244) ; v1(114.046,26.162) 118.319,26.162 124.697,19.784 J3.10@163.849,19.784
  Bottom Layer w0.178: v1(105.546,27.244) 105.546,27.807 105.987,28.249 111.959,28.249 v1(114.046,26.162)
RESET: C10.2 R9.1 U3.7 | length 4.4
  Top Layer w0.178: C10.2@105.948,43.817 105.948,43.563 R9.1@107.498,42.014 107.511,42.001 U3.7@107.511,40.106
"SD CS": R35.1 SDCard1.1 U3.20 | length 56.2
  Top Layer w0.178: U3.20@101.061,36.657 101.838,36.657 101.926,36.569 109.581,36.569 109.6,36.587 110.11,36.587 110.129,36.569 110.691,36.569 v1(110.779,36.656) ; v1@123.317,33.426 123.165,33.579 v1(123.056,33.47) 121.996,32.41 121.996,28.621 123.413,27.203 142.215,27.203 SDCard1.1@144.297,29.286
  Top Layer w0.254: SDCard1.1@144.297,29.286 R35.1@144.297,32.677
  Bottom Layer w0.178: v1(110.779,36.656) 111.624,35.823 120.703,35.823 v1(123.056,33.47)
SHCP1: J2.4 U3.26 | length 66
  Top Layer w0.178: U3.26@101.061,33.656 101.095,33.622 102.259,33.622 102.64,33.241 103.151,33.241 103.597,33.688 110.076,33.688 v1(110.134,33.63) ; v1(114.833,32.334) 120.752,32.334 123.444,35.026 133.971,35.026 134.961,36.017 161.647,36.017 162.206,35.459 J2.4@163.959,35.459
  Bottom Layer w0.178: v1(110.134,33.63) 110.211,33.706 110.432,33.484 114.378,33.484 114.833,33.029 v1(114.833,32.334)
SHCP2: J2.7 U3.55 | length 53
  Top Layer w0.178: U3.55@112.461,33.656 112.462,33.655 119.075,33.655 122.504,37.084 162.089,37.084 162.214,36.959 J2.7@163.959,36.959 J2.7@163.957,36.96
SHCP3: J2.10 U3.57 | length 53.7
  Top Layer w0.178: U3.57@112.461,34.656 112.536,34.581 117.896,34.581 119.137,35.822 119.137,36.826 120.77,38.459 J2.10@163.959,38.459
"SPI1 MISO": R37.1 SDCard1.7 U3.22 | length 32.4
  Top Layer w0.178: U3.22@101.061,35.656 108.661,35.656 v1(108.808,35.509) ; v1(122.631,32.131) 128.664,32.131 R37.1@129.21,32.677
  Top Layer w0.254: SDCard1.7@129.173,30.174 129.21,30.211 R37.1@129.21,32.677
  Bottom Layer w0.178: v1(108.808,35.509) 109.266,35.052 119.71,35.052 v1(122.631,32.131)
"SPI1 MOSI": R38.1 SDCard1.2 U3.23 | length 49
  Top Layer w0.178: U3.23@101.061,35.157 101.091,35.186 107.209,35.186 107.96,34.435 v1(110.57,34.435) ; v1(122.707,31.013) 122.707,28.912 123.604,28.016 140.843,28.016 141.723,28.896 SDCard1.2@141.723,30.174
  Top Layer w0.254: SDCard1.2@141.723,30.174 141.723,32.617 R38.1@141.732,32.626
  Bottom Layer w0.178: v1(110.57,34.435) 119.412,34.435 122.707,31.14 v1(122.707,31.013)
"SPI1 SCK": R36.1 SDCard1.5 U3.21 | length 37.8
  Top Layer w0.178: U3.21@101.061,36.156 109.669,36.156 v1(109.855,35.971) v1@110.041,36.156 ; v1(123.774,32.791) 124.409,33.426 133.388,33.426 R36.1@134.137,32.677
  Top Layer w0.254: R36.1@134.137,32.677 134.137,30.21 SDCard1.5@134.173,30.174
  Bottom Layer w0.178: v1(109.855,35.971) 110.358,35.468 120.042,35.468 122.719,32.791 v1(123.774,32.791)
STCP1: J2.6 U3.8 | length 64.4
  Top Layer w0.178: U3.8@107.011,40.106 107.011,39.136 107.057,39.09 110.771,39.09 112.243,40.561 112.243,42.621 v1(113.005,43.383) ; v1(123.241,36.22) 123.749,36.728 161.942,36.728 162.212,36.459 J2.6@163.959,36.459
  Bottom Layer w0.178: v1(113.005,43.383) 113.005,43.07 114.177,41.897 117.462,41.897 123.139,36.22 v1(123.241,36.22)
STCP2: J2.9 U3.9 | length 63.8
  Top Layer w0.178: U3.9@106.511,40.106 106.511,39.133 106.909,38.734 110.919,38.734 112.979,40.795 v1(112.979,42.189) ; v1(119.998,36.811) 119.998,37.183 120.773,37.959 J2.9@163.959,37.959
  Bottom Layer w0.178: v1(112.979,42.189) 118.358,36.811 v1(119.998,36.811)
STCP3: J2.12 U3.10 | length 63.7
  Top Layer w0.178: U3.10@106.011,40.106 106.011,38.921 106.554,38.379 111.066,38.379 113.995,41.308 v1(113.995,42.951) ; v1(119.333,42.916) 122.791,39.459 J2.12@163.959,39.459
  Bottom Layer w0.178: v1(113.995,42.951) 114.097,42.85 114.163,42.916 v1(119.333,42.916)
SWCLK: R15.1 SWD.3 U3.49 | length 101.1
  Top Layer w0.178: R15.1@43.282,3.95 43.256,3.924 SWD.3@43.256,1.6 44.31,0.546 90.736,0.546 91.81,1.62 110.675,1.62 113.284,4.23 113.284,29.833 U3.49@112.461,30.656
SWDIO: R14.1 SWD.2 U3.46 | length 106.9
  Top Layer w0.178: SWD.2@45.796,1.6 45.847,1.651 R14.1@45.847,3.95 45.18,4.617 45.18,6.143 45.661,6.623 51.886,6.623 v1(53.772,8.509) ; v1(55.753,8.509) 55.728,8.484 57.325,8.484 64.894,0.915 90.602,0.915 94.023,4.335 109.231,4.335 111.522,6.627 111.522,23.29 111.352,23.46 111.352,29.474 111.004,29.822 111.004,30.962 110.544,31.422 109.576,31.422 109.224,31.07 109.224,30.366 109.511,30.079 U3.46@109.511,28.707
  Bottom Layer w0.178: v1(53.772,8.509) v1(55.753,8.509)
UART1_RXD: U3.43 U4.12 | length 112.4
  Top Layer w0.178: U4.12@12.022,51.029 12.601,50.45 22.814,50.45 26.162,53.797 v1(26.543,53.797) ; v1@30.175,53.873 59.487,53.873 v1(66.421,46.939) ; v1(66.726,43.79) 76.302,43.79 v1(88.544,31.547) ; v1(90.399,29.642) 91.161,28.88 92.118,28.88 94.81,26.187 106.675,26.187 108.011,27.523 U3.43@108.011,28.707
  Bottom Layer w0.178: v1(26.543,53.797) 26.67,53.924 v1(30.023,53.924) ; v1(66.421,46.939) 66.726,46.634 v1(66.726,43.79) ; v1(88.544,31.547) 88.544,31.496 v1(90.399,29.642)
UART1_TXD: U3.42 U4.11 | length 112.1
  Top Layer w0.178: U4.11@12.022,52.299 13.551,52.299 16.662,55.41 25.209,55.41 v1(25.324,55.296) ; v1(28.677,55.245) 29.286,55.245 29.717,54.814 59.588,54.814 v1(67.513,46.888) ; v1(67.564,44.425) 67.564,44.399 67.64,44.323 76.886,44.323 v1(89.662,31.547) 89.611,31.496 v1@89.535,31.496 ; v1(91.821,29.667) v1@91.821,29.921 ; v1@91.948,29.794 95.199,26.543 106.528,26.543 107.511,27.526 U3.42@107.511,28.707
  Bottom Layer w0.178: v1(25.324,55.296) 28.626,55.296 v1(28.677,55.245) ; v1(67.513,46.888) 67.564,46.838 v1(67.564,44.425) ; v1(89.662,31.547) 89.941,31.547 v1(91.821,29.667) v1@91.796,29.642
UART2_RXD: P2.3 R8.1 U3.17 U9.1 | length 76.3
  Top Layer w0.178: P2.3@57.201,1.651 57.201,3.874 R8.1@57.252,3.924 ; R8.1@57.252,3.925 v1(58.672,3.925) ; v1(62.478,4.204) 62.469,4.212 62.469,4.586 63.337,5.454 77.212,5.454 78.794,7.036 U9.1@89.052,7.036 91.036,7.036 102.285,18.285 102.285,22.249 101.633,22.901 v1(100.785,22.901) ; v1(100.998,38.978) 101.061,38.915 U3.17@101.061,38.156
  Bottom Layer w0.178: v1(58.672,3.925) 62.198,3.925 ; 62.198,3.924 v1(62.478,4.204) v1@62.478,4.186 ; v1(100.785,22.901) 100.785,22.949 100.998,23.161 v1(100.998,38.978) 101.028,39.008 v1@101.028,39.011
UART2_TXD: P2.2 U3.16 U9.2 | length 76.4
  Top Layer w0.178: v1(62.268,5.312) 62.268,5.389 62.847,5.968 76.909,5.968 79.477,8.536 U9.2@89.052,8.536 92.033,8.536 101.898,18.401 101.898,21.763 v1(101.494,22.168) ; v1(102.117,40.082) 102.141,40.106 U3.16@103.011,40.106
  Bottom Layer w0.178: P2.2@59.741,1.651 59.594,1.651 58.007,3.238 58.007,4.51 58.808,5.312 v1(62.268,5.312) ; v1(101.494,22.168) 101.614,22.289 101.614,39.471 101.669,39.525 101.667,39.527 102.117,39.977 v1(102.117,40.082)
USB_CTRL: R34.1 U3.11 | length 50.7
  Top Layer w0.178: v1(100.241,24.354) 100.241,24.601 100.45,24.392 109.918,24.392 110.669,23.641 110.669,7.863 R34.1@110.63,7.823 ; v1(100.851,40.27) 100.851,40.085 103.123,37.813 104.664,37.813 105.511,38.66 U3.11@105.511,40.106
  Bottom Layer w0.178: v1(100.241,24.354) 100.265,24.378 100.265,39.683 v1(100.851,40.27)
USB_N: R32.1 U3.44 | length 20.9
  Top Layer w0.178: R32.1@106.019,9.429 106.019,10.001 106.629,10.611 106.629,17.269 108.594,19.234 108.594,23.39 v1(108.322,23.662) ; v1(108.322,26.308) 108.487,26.308 108.583,26.404 108.583,27.795 108.511,27.868 U3.44@108.511,28.707
  Bottom Layer w0.178: v1(108.322,23.662) 108.583,23.923 108.583,26.047 v1(108.322,26.308)
USB_P: R33.1 U3.45 | length 21
  Top Layer w0.178: R33.1@107.594,9.436 107.594,10.007 106.984,10.618 106.984,11.105 106.984,11.283 106.984,11.461 cw(c107.162,11.461) 107.162,11.639 ccw(c107.162,11.817) 107.34,11.817 ccw(c107.162,11.817) 107.162,11.994 cw(c107.162,12.172) 106.984,12.172 106.984,12.524 106.984,17.122 108.95,19.087 108.95,23.412 v1(109.2,23.662) ; v1@108.939,26.404 108.939,27.795 109.011,27.868 U3.45@109.011,28.707
  Bottom Layer w0.178: v1(109.2,23.662) 108.939,23.923 108.939,26.047 v1(109.2,26.308)
VDD_5V: C28.1 C30.2 C34.2 C45.1 C46.2 C47.2 U5.2 U5.4 U6.3 U8.1 U8.5 USB_OTG.1 | length 134.3
  Top Layer w0.254: v1(68.133,28.901) 68.083,28.951 68.152,28.883 86.239,28.883 v1(86.277,28.845) ; U8.5@73.466,52.325 73.479,52.338 C46.2@73.479,53.602 73.262,53.602 72.111,52.451 72.111,50.698 72.484,50.325 U8.1@73.466,50.325 73.483,50.309 C47.2@73.483,49.18 ; v1(96.125,23.699) 101.391,23.699 105.033,20.058 105.033,6.354 USB_OTG.1@105.825,5.562
  Top Layer w0.762: C28.1@49.026,43.046 49.716,43.737 C30.2@49.716,46.48 ; 49.665,47.684 49.665,46.53 C30.2@49.716,46.48 ; U5.2@54.974,39.516 U5.4@54.974,46.066 50.13,46.066 C30.2@49.716,46.48 ; C45.1@73.463,47.142 73.463,49.161 C47.2@73.483,49.18
  Top Layer w1.143: C34.2@49.665,48.181 57.838,48.181 60.147,45.873 ; v1(60.774,29.011) 60.653,29.132 U6.3@59.108,29.132 59.108,29.416 60.147,30.454 60.147,45.873 ; C45.1@73.463,47.142 73.463,46.444 72.612,45.593 60.427,45.593 60.147,45.873
  Bottom Layer w0.254: v1(60.774,29.011) 68.023,29.011 v1(68.133,28.901) ; v1(86.277,28.845) 90.979,28.845 v1(96.125,23.699)
VDD_12V: C25.2 C26.2 C27.1 C29.2 D2.A F1.2 R22.2 U5.3 | length 66.1
  Top Layer w0.762: R22.2@16.918,13.749 16.943,13.774 C26.2@16.943,15.375 ; F1.2@17.018,22.809 17.018,17.05 C25.2@16.968,17 16.968,15.4 C26.2@16.943,15.375 ; D2.A@22.01,16.264 21.121,15.375 20.16,15.375 ; U5.3@57.274,39.516 57.315,39.475 C29.2@57.315,37.44 55.819,35.944 C27.1@53.639,35.944 45.596,27.9 45.596,24.114 35.655,14.173 21.361,14.173 20.16,15.375 ; C26.2@16.943,15.375 20.16,15.375
VDD_18V: C3A.1 C3B.1 C3C.1 C3D.1 C4A.2 C4B.2 C4C.2 C4D.2 C5A.2 C5B.2 C5C.2 C5D.2 C6A.2 C6B.2 C6C.2 C6D.2 C39.1 C40.2 C41.2 D4.C Q1A.3 Q1B.3 Q1C.3 Q1D.3 R17.1 R19.1 R20.1 R21.1 R25.2 R27.2 U1A.8 U1B.8 U1C.8 U1D.8 U2A.2 U2B.2 U2C.2 U2D.2 | length 302.6
  Top Layer w0.381: C5C.2@59.646,84.272 59.683,84.31 R19.1@61.486,84.31 ; C5B.2@99.422,84.247 99.423,84.248 R17.1@101.309,84.248 ; C5A.2@138.901,84.366 138.926,84.341 R21.1@141.152,84.341
  Top Layer w0.508: Q1D.3@16.1,78.239 16.824,78.239 C6D.2@17.731,79.146 17.769,79.184 U1D.8@17.769,81.018 19.364,82.613 C4D.2@19.674,82.613 ; R20.1@21.395,84.337 21.373,84.315 C5D.2@19.674,84.315 C4D.2@19.674,82.613 ; U2D.2@23.698,72.72 22.809,73.608 22.809,80.714 20.91,82.613 C4D.2@19.674,82.613 ; Q1C.3@56.072,78.196 56.796,78.196 C6C.2@57.703,79.103 57.741,79.141 U1C.8@57.741,80.975 59.336,82.57 C4C.2@59.646,82.57 ; C5C.2@59.646,84.272 C4C.2@59.646,82.57 ; U2C.2@62.45,72.753 62.45,80.94 60.821,82.57 C4C.2@59.646,82.57 ; Q1B.3@95.849,78.171 96.572,78.171 C6B.2@97.479,79.078 97.517,79.116 U1B.8@97.517,80.95 99.112,82.545 C4B.2@99.422,82.545 ; C5B.2@99.422,84.247 C4B.2@99.422,82.545 ; U2B.2@101.16,72.728 102.159,73.726 102.159,81.356 100.97,82.545 C4B.2@99.422,82.545 ; Q1A.3@135.328,78.29 136.051,78.29 C6A.2@136.958,79.197 136.996,79.235 U1A.8@136.996,81.069 138.591,82.664 C4A.2@138.901,82.664 ; C5A.2@138.901,84.366 C4A.2@138.901,82.664 ; U2A.2@139.877,72.847 140.654,73.623 140.654,82.148 140.138,82.664 C4A.2@138.901,82.664
  Top Layer w0.762: R25.2@25.637,43.254 31.992,43.254 D4.C@32.831,42.416 32.831,48.367 C39.1@33.839,49.375 ; C39.1@33.903,49.312 C40.2@37.334,49.312 38.908,49.312 R27.2@40.432,49.312
  Top Layer w1.143: U2D.2@23.698,72.72 23.698,68.925 19.837,65.064 C3D.1@19.837,62.466 19.889,62.466 24.308,58.047 ; C39.1@33.839,49.375 32.979,49.375 24.308,58.047 ; U2C.2@62.45,72.753 62.45,68.958 58.59,65.098 C3C.1@58.59,62.499 54.137,58.047 ; U2B.2@101.16,72.728 101.16,68.933 97.299,65.072 C3B.1@97.299,62.474 92.872,58.047 ; U2A.2@139.877,72.847 139.877,69.052 136.016,65.191 C3A.1@136.016,62.593 131.47,58.047 92.872,58.047 ; 24.308,58.047 54.137,58.047 ; 54.137,58.047 92.872,58.047
pads on no net: "USB_OTG. " J1A.3 J1B.3 J1C.3 J1D.3 MH2.MH1 MH3.MH1 MH4.MH1 MK1.MK MK2.MK MK3.MK SDCard1.0 SDCard1.8 SDCard1.9 SDCard1.10 SDCard1.11 SDCard1.12 SDCard1.13 T1A.2 T1B.2 T1C.2 T1D.2 U3.2 U3.3 U3.4 U3.35 U3.52 U3.53 U3.54 U4.7 U4.8 U4.9 U4.10 U9.3 U9.4 U9.8 U9.9 U9.10 U9.11 U9.14 U9.15 U9.16 U9.17 U9.18 U9.19 U9.20 U9.23 U9.24 U9.25 U9.26 U9.27 U9.28 U9.29 U9.30 U9.31 U9.32 U9.33 U9.34 USB_OTG.4
copper on no net:
  other v2: 163.832,2.993 166.168,3.019 162.685,5 167.315,5 163.857,7.032 166.195,7.034 3.832,82.993 163.832,82.993 6.168,83.019 166.168,83.019 2.685,85 7.315,85 162.685,85 167.315,85 3.857,87.032 6.195,87.034 163.857,87.032 166.195,87.034

## Polygon pours and split planes (outlines as drawn)
AGND on Top Layer "AGND" (solid, pour order 9): 0,26.111 18.009,26.111 18.009,0.152 17.958,0.102 17.907,0.051 0.025,0.051 0.025,26.187 0,26.213
AGND on Top Layer "Top Layer-No Net" (solid, pour order 6): -0.01,25.763 0.014,25.787 15.997,25.787
DGND on Top Layer "DGND" (solid, pour order 8): 0.025,89.891 0.025,90.119 169.977,90.119 169.748,90.119 169.748,-0.178 169.748,0.051 -0.203,0.051 -0.203,89.891
DGND on Bottom Layer "DGND" (solid, pour order 10): 0.051,-0.102 170.078,-0.102 170.078,89.179 169.088,90.17 168.681,89.764 0.254,89.764 0.254,0.457 0.432,0.279
AGND on Bottom Layer "AGND" (solid, pour order 7): 17.958,0 17.958,26.06 17.907,26.111 17.856,26.06 -0.508,26.06 -0.508,0.61 0.178,-0.076 0.254,0 17.958,0

## Keep-outs
Keep-Out Layer:
  the board outline again, w0.1

## Other copper
Top Layer:
  rectangle net DGND: 105.969,37.008 110.211,37.922
  rectangle net DGND: 111.626,43.883 112.306,44.596
  rectangle net DGND: 111.658,43.51 112.395,43.993
  pour cut-out: 144.363,73.211 146.863,73.211 146.863,77.711 160.963,77.711 160.963,73.211 163.463,73.211 163.463,64.211 160.963,64.211 160.963,59.654 146.863,59.654 146.863,64.211 144.363,64.211
  pour cut-out: 105.489,72.843 107.989,72.843 107.989,77.343 122.089,77.343 122.089,72.843 124.589,72.843 124.589,63.843 122.089,63.843 122.089,59.286 107.989,59.286 107.989,63.843 105.489,63.843
  pour cut-out: 66.881,73.122 69.381,73.122 69.381,77.622 83.481,77.622 83.481,73.122 85.981,73.122 85.981,64.122 83.481,64.122 83.481,59.565 69.381,59.565 69.381,64.122 66.881,64.122
  pour cut-out: 28.121,72.945 30.621,72.945 30.621,77.445 44.721,77.445 44.721,72.945 47.221,72.945 47.221,63.945 44.721,63.945 44.721,59.388 30.621,59.388 30.621,63.945 28.121,63.945
  pour cut-out: 31.521,30.683 cw(c31.123,30.518) 31.521,30.353 31.648,21.514 ccw(c33.243,23.108) 33.243,20.853 42.672,20.853 ccw(c42.672,21.221) 42.932,20.961 43.612,21.641 cw(c44.102,21.844) 43.612,22.047 43.5,31.725 ccw(c42.494,31.725) 43.205,32.436 42.824,32.817 32.741,32.817 ccw(c32.741,31.775) 32.003,32.511 31.648,31.877 cw(c31.35,31.933) 31.521,31.683
  pour cut-out: 108.585,52.908 111.851,52.908 cw(c111.851,50.368) 113.647,52.164 114.224,51.587 ccw(c114.285,51.526) 114.198,51.526 114.198,49.225 113.247,48.274 cw(c112.293,49.228) 112.293,47.879 105.345,47.879 cw(c105.345,50.419) 103.548,48.623 102.946,49.225 102.946,50.561 cw(c105.486,50.561) 103.69,52.357 103.861,52.527 cw(c104.658,51.73) 104.658,52.857 108.509,52.857
Multi-Layer:
  pour cut-out: 75.844,6.248 89.078,6.248 89.078,0.152 75.819,0.152 75.819,6.223

## Silkscreen, mask and mechanical layers (free items; w line width, h text height)
Top Overlay:
  lines w0.15: 4.484,30.158 5.678,31.351 5.678,33.637 ; 5.704,27.338 5.704,29.802
  text "VIN+" at 23.59,5.035 h1
  text "VIN-" at 15.634,4.933 h1

## Dimensions
0,0 to 170,0 on Mechanical 16
0,0 to 0,90 on Mechanical 16